# EAGLE board Testing suite 1 layout (EAGLE 9.2.2)
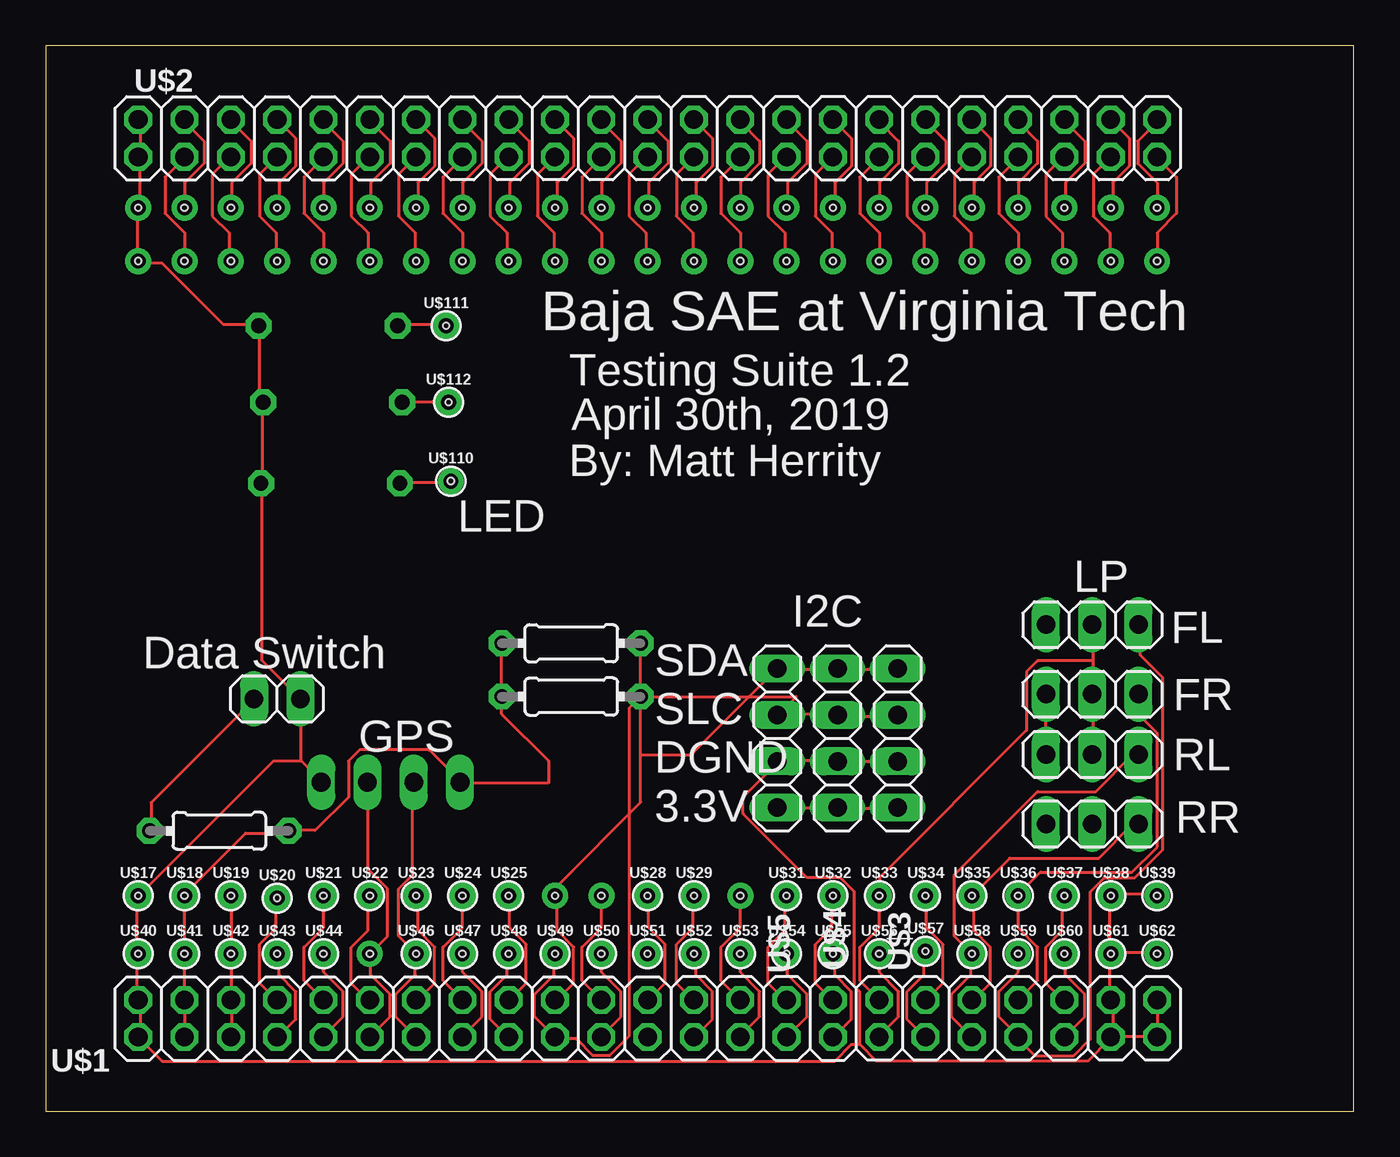
[diagram p0: board, top side]
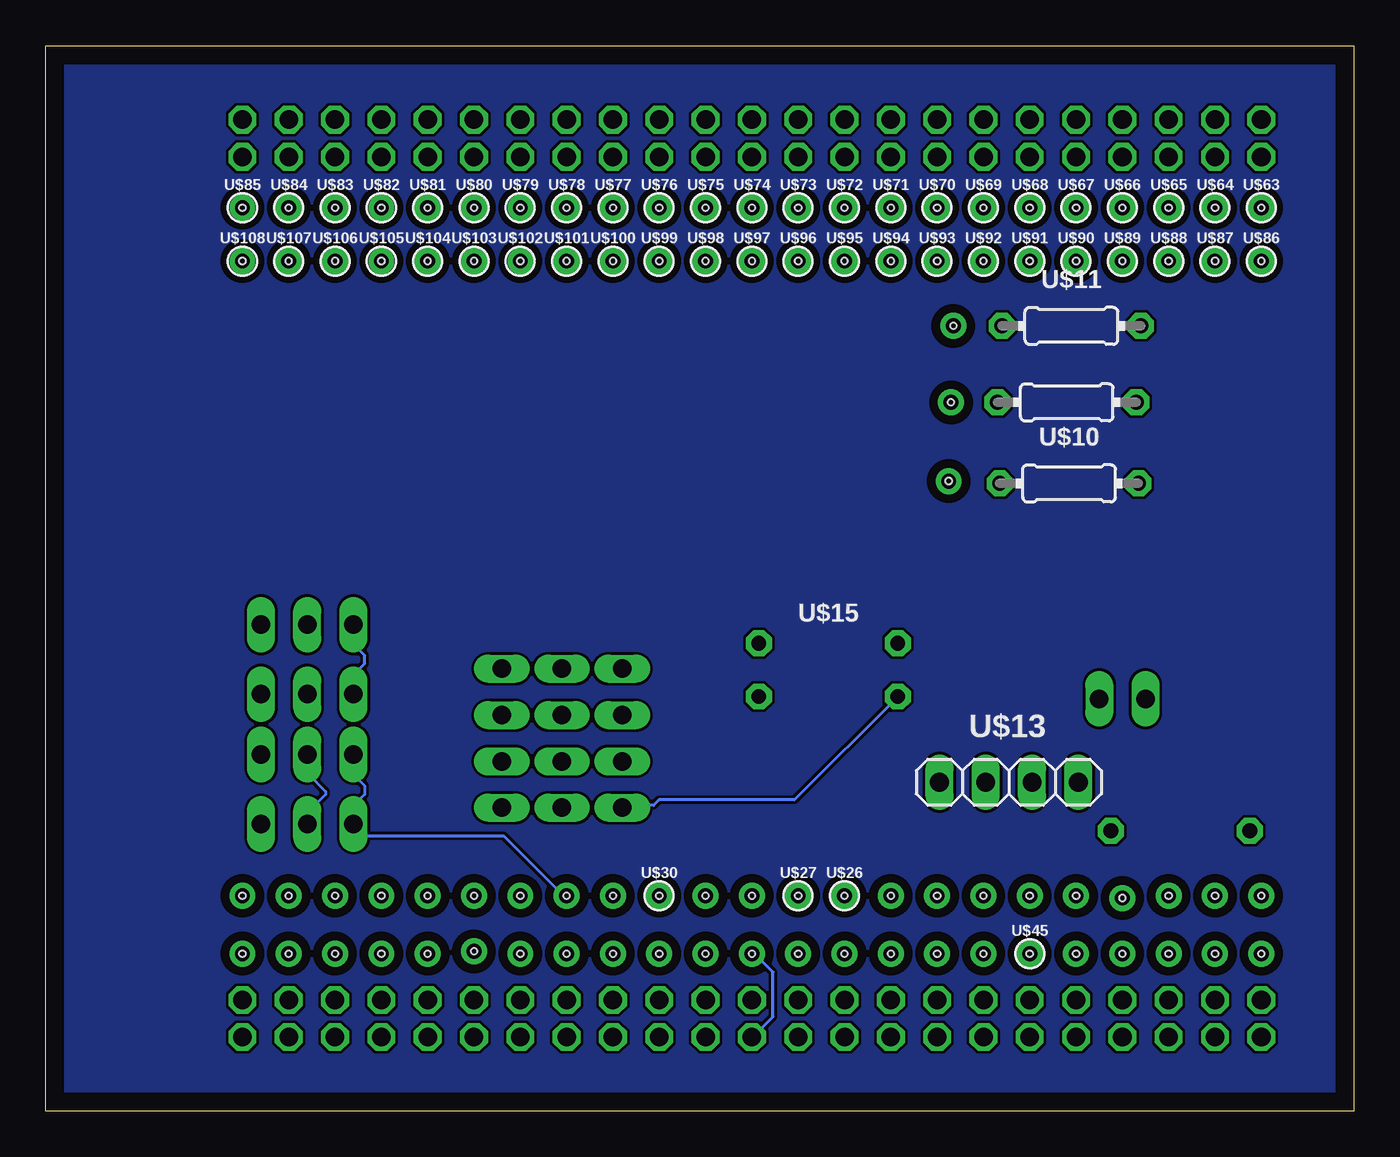
[diagram p1: board, bottom side, seen from below]

Size 71.75 x 58.42 mm. Coordinates in mm from the lower left corner, seen from the top.
Outline: 0,0 71.75,0 71.75,58.42 0,58.42 0,0
Copper layers (1*16): Top 0.035mm / dielectric 1.5mm / Bottom 0.035mm
Design rules "default": minimum track width 6mil, minimum drill 0.35mm, track to track 6mil, track to pad 6mil, pad to pad 6mil, via to via 6mil, smd to smd 6mil, copper to edge 40mil, drill to drill 6mil, minimum pad ring 10mil, minimum via ring 8mil, stop-mask expansion 4mil, vias tented up to drill 0mil, thermal gap 10mil

## Footprints (pad centres in the part's own frame; a part is rotated, then mirrored left to right if it is on the bottom)
2X23 = drill 1.016 octagon: 1 -27.94,-1.27; 2 -27.94,0.762; 3 -25.4,-1.27; 4 -25.4,0.762; 5 -22.86,-1.27; 6 -22.86,0.762; 7 -20.32,-1.27; 8 -20.32,0.762; 9 -17.78,-1.27; 10 -17.78,0.762; 11 -15.24,-1.27; 12 -15.24,0.762; 13 -12.7,-1.27; 14 -12.7,0.762; 15 -10.16,-1.27; 16 -10.16,0.762; 17 -7.62,-1.27; 18 -7.62,0.762; 19 -5.08,-1.27; 20 -5.08,0.762; 21 -2.54,-1.27; 22 -2.54,0.762; 23 0,-1.27; 24 0,0.762; 25 2.54,-1.27; 26 2.54,0.762; 27 5.08,-1.27; 28 5.08,0.762; 29 7.62,-1.27; 30 7.62,0.762; 31 10.16,-1.27; 32 10.16,0.762; 33 12.7,-1.27; 34 12.7,0.762; 35 15.24,-1.27; 36 15.24,0.762; 37 17.78,-1.27; 38 17.78,0.762; 39 20.32,-1.27; 40 20.32,0.762; 41 22.86,-1.27; 42 22.86,0.762; 43 25.4,-1.27; 44 25.4,0.762; 45 27.94,-1.27; 46 27.94,0.762
1X04 = drill 1.016 long: 1 -3.81,0; 2 -1.27,0; 3 1.27,0; 4 3.81,0
1X03 = drill 1.016 long: 1 -2.54,0; 2 0,0; 3 2.54,0
0204/7 = drill 0.813 pad 1.422 octagon: 1 -3.81,0; 2 3.81,0
PAD_OUT = drill 0.813 pad 1.422: 1 0,0 | hole 0.35: 0,0
1X02 = drill 1.016 long: 1 -1.27,0; 2 1.27,0

## Placement (x,y rotation side)
U$1  PIN-TOBEAGLEBONE  [2X23]  33.02,5.33 0 top
U$2  PIN-TOBEAGLEBONE  [2X23]  33.02,53.59 0 top
U$3  I2C-PINS  [1X04]  46.74,20.45 90 top
U$4  I2C-PINS  [1X04]  43.43,20.45 90 top
U$5  I2C-PINS  [1X04]  40.13,20.45 90 top
U$6  LP_PINS  [1X03]  57.4,26.67 0 top
U$7  LP_PINS  [1X03]  57.4,22.86 0 top
U$8  LP_PINS  [1X03]  57.4,19.56 0 top
U$9  LP_PINS  [1X03]  57.4,15.75 0 top
U$10  R-400MWRESISTOR  [0204/7]  15.62,34.42 0 bottom
U$11  R-400MWRESISTOR  [0204/7]  15.49,43.05 0 bottom
U$12  R-400MWRESISTOR  [0204/7]  15.75,38.86 0 bottom
U$13  GPS_PINS  [1X04]  18.92,18.03 0 bottom
U$14  R-400MWRESISTOR  [0204/7]  9.53,15.37 180 top
U$15  R-400MWRESISTOR  [0204/7]  28.83,25.65 0 top
U$16  R-400MWRESISTOR  [0204/7]  28.83,22.73 0 top
U$17  PAD_OUT  [PAD_OUT]  5.08,11.81 0 top
U$18  PAD_OUT  [PAD_OUT]  7.62,11.81 0 top
U$19  PAD_OUT  [PAD_OUT]  10.16,11.81 0 top
U$20  PAD_OUT  [PAD_OUT]  12.7,11.68 0 top
U$21  PAD_OUT  [PAD_OUT]  15.24,11.81 0 top
U$22  PAD_OUT  [PAD_OUT]  17.78,11.81 0 top
U$23  PAD_OUT  [PAD_OUT]  20.32,11.81 0 top
U$24  PAD_OUT  [PAD_OUT]  22.86,11.81 0 top
U$25  PAD_OUT  [PAD_OUT]  25.4,11.81 0 top
U$26  PAD_OUT  [PAD_OUT]  27.94,11.81 0 bottom
U$27  PAD_OUT  [PAD_OUT]  30.48,11.81 0 bottom
U$28  PAD_OUT  [PAD_OUT]  33.02,11.81 0 top
U$29  PAD_OUT  [PAD_OUT]  35.56,11.81 0 top
U$30  PAD_OUT  [PAD_OUT]  38.1,11.81 0 bottom
U$31  PAD_OUT  [PAD_OUT]  40.64,11.81 0 top
U$32  PAD_OUT  [PAD_OUT]  43.18,11.81 0 top
U$33  PAD_OUT  [PAD_OUT]  45.72,11.81 0 top
U$34  PAD_OUT  [PAD_OUT]  48.26,11.81 0 top
U$35  PAD_OUT  [PAD_OUT]  50.8,11.81 0 top
U$36  PAD_OUT  [PAD_OUT]  53.34,11.81 0 top
U$37  PAD_OUT  [PAD_OUT]  55.88,11.81 0 top
U$38  PAD_OUT  [PAD_OUT]  58.42,11.81 0 top
U$39  PAD_OUT  [PAD_OUT]  60.96,11.81 0 top
U$40  PAD_OUT  [PAD_OUT]  5.08,8.64 0 top
U$41  PAD_OUT  [PAD_OUT]  7.62,8.64 0 top
U$42  PAD_OUT  [PAD_OUT]  10.16,8.64 0 top
U$43  PAD_OUT  [PAD_OUT]  12.7,8.64 0 top
U$44  PAD_OUT  [PAD_OUT]  15.24,8.64 0 top
U$45  PAD_OUT  [PAD_OUT]  17.78,8.64 0 bottom
U$46  PAD_OUT  [PAD_OUT]  20.32,8.64 0 top
U$47  PAD_OUT  [PAD_OUT]  22.86,8.64 0 top
U$48  PAD_OUT  [PAD_OUT]  25.4,8.64 0 top
U$49  PAD_OUT  [PAD_OUT]  27.94,8.64 0 top
U$50  PAD_OUT  [PAD_OUT]  30.48,8.64 0 top
U$51  PAD_OUT  [PAD_OUT]  33.02,8.64 0 top
U$52  PAD_OUT  [PAD_OUT]  35.56,8.64 0 top
U$53  PAD_OUT  [PAD_OUT]  38.1,8.64 0 top
U$54  PAD_OUT  [PAD_OUT]  40.64,8.64 0 top
U$55  PAD_OUT  [PAD_OUT]  43.18,8.64 0 top
U$56  PAD_OUT  [PAD_OUT]  45.72,8.64 0 top
U$57  PAD_OUT  [PAD_OUT]  48.26,8.76 0 top
U$58  PAD_OUT  [PAD_OUT]  50.8,8.64 0 top
U$59  PAD_OUT  [PAD_OUT]  53.34,8.64 0 top
U$60  PAD_OUT  [PAD_OUT]  55.88,8.64 0 top
U$61  PAD_OUT  [PAD_OUT]  58.42,8.64 0 top
U$62  PAD_OUT  [PAD_OUT]  60.96,8.64 0 top
U$63  PAD_OUT  [PAD_OUT]  5.08,49.53 0 bottom
U$64  PAD_OUT  [PAD_OUT]  7.62,49.53 0 bottom
U$65  PAD_OUT  [PAD_OUT]  10.16,49.53 0 bottom
U$66  PAD_OUT  [PAD_OUT]  12.7,49.53 0 bottom
U$67  PAD_OUT  [PAD_OUT]  15.24,49.53 0 bottom
U$68  PAD_OUT  [PAD_OUT]  17.78,49.53 0 bottom
U$69  PAD_OUT  [PAD_OUT]  20.32,49.53 0 bottom
U$70  PAD_OUT  [PAD_OUT]  22.86,49.53 0 bottom
U$71  PAD_OUT  [PAD_OUT]  25.4,49.53 0 bottom
U$72  PAD_OUT  [PAD_OUT]  27.94,49.53 0 bottom
U$73  PAD_OUT  [PAD_OUT]  30.48,49.53 0 bottom
U$74  PAD_OUT  [PAD_OUT]  33.02,49.53 0 bottom
U$75  PAD_OUT  [PAD_OUT]  35.56,49.53 0 bottom
U$76  PAD_OUT  [PAD_OUT]  38.1,49.53 0 bottom
U$77  PAD_OUT  [PAD_OUT]  40.64,49.53 0 bottom
U$78  PAD_OUT  [PAD_OUT]  43.18,49.53 0 bottom
U$79  PAD_OUT  [PAD_OUT]  45.72,49.53 0 bottom
U$80  PAD_OUT  [PAD_OUT]  48.26,49.53 0 bottom
U$81  PAD_OUT  [PAD_OUT]  50.8,49.53 0 bottom
U$82  PAD_OUT  [PAD_OUT]  53.34,49.53 0 bottom
U$83  PAD_OUT  [PAD_OUT]  55.88,49.53 0 bottom
U$84  PAD_OUT  [PAD_OUT]  58.42,49.53 0 bottom
U$85  PAD_OUT  [PAD_OUT]  60.96,49.53 0 bottom
U$86  PAD_OUT  [PAD_OUT]  5.08,46.61 0 bottom
U$87  PAD_OUT  [PAD_OUT]  7.62,46.61 0 bottom
U$88  PAD_OUT  [PAD_OUT]  10.16,46.61 0 bottom
U$89  PAD_OUT  [PAD_OUT]  12.7,46.61 0 bottom
U$90  PAD_OUT  [PAD_OUT]  15.24,46.61 0 bottom
U$91  PAD_OUT  [PAD_OUT]  17.78,46.61 0 bottom
U$92  PAD_OUT  [PAD_OUT]  20.32,46.61 0 bottom
U$93  PAD_OUT  [PAD_OUT]  22.86,46.61 0 bottom
U$94  PAD_OUT  [PAD_OUT]  25.4,46.61 0 bottom
U$95  PAD_OUT  [PAD_OUT]  27.94,46.61 0 bottom
U$96  PAD_OUT  [PAD_OUT]  30.48,46.61 0 bottom
U$97  PAD_OUT  [PAD_OUT]  33.02,46.61 0 bottom
U$98  PAD_OUT  [PAD_OUT]  35.56,46.61 0 bottom
U$99  PAD_OUT  [PAD_OUT]  38.1,46.61 0 bottom
U$100  PAD_OUT  [PAD_OUT]  40.64,46.61 0 bottom
U$101  PAD_OUT  [PAD_OUT]  43.18,46.61 0 bottom
U$102  PAD_OUT  [PAD_OUT]  45.72,46.61 0 bottom
U$103  PAD_OUT  [PAD_OUT]  48.26,46.61 0 bottom
U$104  PAD_OUT  [PAD_OUT]  50.8,46.61 0 bottom
U$105  PAD_OUT  [PAD_OUT]  53.34,46.61 0 bottom
U$106  PAD_OUT  [PAD_OUT]  55.88,46.61 0 bottom
U$107  PAD_OUT  [PAD_OUT]  58.42,46.61 0 bottom
U$108  PAD_OUT  [PAD_OUT]  60.96,46.61 0 bottom
U$109  SWITCH_OUT  [1X02]  12.7,22.61 180 top
U$110  PAD_OUT  [PAD_OUT]  22.23,34.54 0 top
U$111  PAD_OUT  [PAD_OUT]  21.97,43.05 0 top
U$112  PAD_OUT  [PAD_OUT]  22.1,38.86 0 top

## Library data of the parts
U$1-U$112 = TestingCape

## Nets
N$1: U$1.39 U$6.3 U$59.1
N$2: U$1.40 U$7.3 U$36.1
N$3: U$1.5 U$1.6 U$19.1 U$42.1
N$4: U$14.2 U$109.2
N$5: U$1.37 U$8.3 U$58.1
N$6: U$1.19 U$3.3 U$4.3 U$5.3 U$16.2 U$49.1
N$7: U$1.20 U$3.4 U$4.4 U$5.4 U$15.2 U$26.1
N$8: U$1.32 U$6.1 U$7.1 U$8.1 U$9.1 U$32.1
N$9: U$1.34 U$6.2 U$7.2 U$8.2 U$9.2 U$33.1
N$10: U$1.38 U$9.3 U$35.1
N$11: U$1.1 U$1.2 U$1.43 U$1.44 U$1.45 U$1.46 U$2.1 U$2.2 U$3.2 U$4.2 U$5.2 U$10.2 U$11.2 U$12.2 U$13.4 U$17.1 U$38.1 U$39.1 U$40.1 U$61.1 U$62.1 U$63.1 U$86.1 U$109.1
N$12: U$1.11 U$13.3 U$45.1
N$13: U$1.13 U$13.2 U$46.1
N$14: U$1.41 U$60.1
N$15: U$1.35 U$57.1
N$16: U$1.33 U$56.1
N$17: U$1.31 U$55.1
N$18: U$1.29 U$54.1
N$19: U$1.27 U$53.1
N$20: U$1.25 U$52.1
N$21: U$1.23 U$51.1
N$22: U$1.21 U$50.1
N$23: U$1.17 U$48.1
N$24: U$1.15 U$47.1
N$25: U$1.9 U$44.1
N$26: U$1.7 U$43.1
N$27: U$1.42 U$37.1
N$28: U$1.36 U$34.1
N$29: U$1.30 U$31.1
N$30: U$1.28 U$30.1
N$31: U$1.8 U$20.1
N$32: U$1.10 U$21.1
N$33: U$1.12 U$22.1
N$34: U$1.14 U$23.1
N$35: U$1.16 U$24.1
N$36: U$1.18 U$25.1
N$37: U$1.22 U$27.1
N$38: U$1.24 U$28.1
N$39: U$1.26 U$29.1
N$40: U$2.3 U$87.1
N$41: U$2.5 U$88.1
N$42: U$2.7 U$89.1
N$43: U$2.9 U$90.1
N$44: U$2.11 U$91.1
N$45: U$2.13 U$92.1
N$46: U$2.15 U$93.1
N$47: U$2.17 U$94.1
N$48: U$2.19 U$95.1
N$49: U$2.21 U$96.1
N$50: U$2.23 U$97.1
N$51: U$2.25 U$98.1
N$52: U$2.27 U$99.1
N$53: U$2.28 U$76.1
N$54: U$2.26 U$75.1
N$55: U$2.24 U$74.1
N$56: U$2.22 U$73.1
N$57: U$2.20 U$72.1
N$58: U$2.18 U$71.1
N$59: U$2.16 U$70.1
N$60: U$2.4 U$64.1
N$61: U$2.6 U$65.1
N$62: U$2.8 U$66.1
N$63: U$2.10 U$67.1
N$64: U$2.12 U$68.1
N$65: U$2.14 U$69.1
N$66: U$2.29 U$100.1
N$67: U$2.30 U$77.1
N$68: U$2.32 U$78.1
N$69: U$2.31 U$101.1
N$70: U$2.33 U$102.1
N$71: U$2.34 U$79.1
N$72: U$2.36 U$80.1
N$73: U$2.35 U$103.1
N$74: U$2.37 U$104.1
N$75: U$2.39 U$105.1
N$76: U$2.41 U$106.1
N$77: U$2.43 U$107.1
N$78: U$2.45 U$108.1
N$79: U$2.46 U$85.1
N$80: U$2.44 U$84.1
N$81: U$2.42 U$83.1
N$82: U$2.40 U$82.1
N$83: U$2.38 U$81.1
N$85: U$1.3 U$1.4 U$3.1 U$4.1 U$5.1 U$13.1 U$14.1 U$15.1 U$16.1 U$18.1 U$41.1
N$86: U$10.1 U$110.1
N$87: U$11.1 U$111.1
N$88: U$12.1 U$112.1

## Tracks (layer width: path | path; a pad name or v marks a point on that pad's centre or on a via)
GND
  pour Bottom: 0,0 71.75,0 71.75,58.42 0,58.42
N$1
  Top 0.152: U$59.1 53.34,7.62 52.27,6.55 52.27,5.18 53.34,4.12 U$1.39 53.34,3.96 54.25,3.05 56.39,3.05 57.3,3.96 57.3,12.04 58.06,12.8 59.74,12.8 61.27,14.33 61.27,23.77 60.05,24.99 60.05,26.67 U$6.3
N$2
  Top 0.152: U$1.40 54.41,7.16 54.41,8.99 53.34,10.06 U$36.1 53.34,11.89 54.56,13.11 59.59,13.11 60.96,14.48 60.96,20.73 60.05,21.64 60.05,22.86 U$7.3
N$3
  Top 0.152: 10.21,6.1 10.21,8.53 U$42.1 10.21,8.69 10.21,11.73 U$19.1 | 10.21,6.1 10.21,4.12 U$1.5 | 10.21,6.1 U$1.6
N$4
  Top 0.152: U$14.2 5.79,15.39 5.79,16.92 11.43,22.55 U$109.2
N$5
  Top 0.152: U$1.37 49.68,5.18 49.68,6.4 50.75,7.47 50.75,8.53 U$58.1 49.84,9.6 49.84,12.95 54.41,17.53 57.61,17.53 59.59,19.51 59.89,19.51 U$8.3
N$6
  Top 0.152: U$49.1 27.89,8.53 27.89,7.47 26.82,6.4 26.82,5.18 U$1.19 28.04,3.96 29.11,3.96 30.02,3.05 30.94,3.05 32,4.12 32,22.1 U$16.2 41.17,22.73 40.08,21.64 U$5.3 40.23,21.79 43.33,21.79 U$4.3 43.48,21.64 46.74,21.64 U$3.3
N$7
  Top 0.152: U$1.20 28.04,6.1 28.96,7.01 28.96,8.99 28.04,9.91 28.04,11.73 U$26.1 28.04,11.89 28.04,12.34 32.64,16.94 U$15.2 32.64,19.51 35.36,19.51 40.08,24.23 U$5.4 40.23,24.23 43.33,24.23 U$4.4 43.48,24.23 46.74,24.23 U$3.4
N$8
  Top 0.152: U$32.1 43.13,11.73 43.13,10.06 42.22,9.14 42.22,7.01 43.13,6.1 U$1.32 | U$8.1 U$7.1
  Bottom 0.152: U$8.1 54.86,18.44 54.25,17.83 54.25,17.37 54.86,16.76 U$9.1 54.86,15.7 54.25,15.09 46.63,15.09 43.74,12.19 43.59,12.19 43.28,11.89 U$32.1 | U$6.1 54.86,25.6 54.25,24.99 54.25,24.54 54.86,23.93 U$7.1
N$9
  Top 0.152: U$1.34 44.65,7.16 44.65,8.99 45.72,10.06 U$33.1 45.72,12.8 53.8,20.88 53.8,24.08 54.41,24.69 57.45,24.69 | 57.45,22.86 57.45,19.66 U$8.2 | 57.45,22.86 57.45,24.69 | 57.45,24.69 57.45,26.67 U$6.2 | 57.45,22.86 U$7.2
  Bottom 0.152: U$9.2 57.3,15.85 57.3,16.46 56.39,17.37 56.39,17.53 57.3,18.44 57.3,19.51 U$8.2
N$10
  Top 0.152: U$1.38 50.9,6.1 51.82,7.01 51.82,8.99 50.9,9.91 50.9,11.73 U$35.1 50.9,11.89 52.88,13.87 57.76,13.87 59.59,15.7 59.89,15.7 U$9.3
N$11
  Top 0.152: U$3.2 U$4.2 43.33,19.2 40.23,19.2 U$5.2 40.08,19.05 38.25,17.22 38.25,16.31 41.76,12.8 43.59,12.8 44.35,12.04 44.35,6.86 44.65,6.55 44.65,3.66 | U$1.46 60.96,4.12 | U$39.1 60.96,11.89 58.52,11.89 U$38.1 58.37,11.73 58.37,8.69 U$61.1 | U$61.1 58.52,8.69 60.96,8.69 U$62.1 | 58.52,4.12 58.52,6.1 U$1.44 58.37,6.1 58.37,8.53 U$61.1 | 58.52,4.12 60.96,4.12 | 60.96,4.12 U$1.45 | 58.52,4.12 U$1.43 58.37,3.96 57.15,2.74 45.57,2.74 44.65,3.66 | U$2.2 5.18,54.25 5.18,52.43 U$2.1 5.18,52.27 5.18,49.53 U$63.1 5.03,49.53 5.03,46.63 U$86.1 5.18,46.48 6.4,46.48 9.75,43.13 11.58,43.13 U$11.2 11.73,42.98 11.73,39.01 11.89,38.86 | 11.89,38.86 11.89,34.44 U$10.2 11.89,34.29 11.89,24.69 U$109.1 14.02,22.55 14.02,19.2 | 11.89,38.86 U$12.2 | 14.02,19.2 15.09,18.14 U$13.4 | 14.02,19.2 12.5,19.2 5.18,11.89 U$17.1 5.03,11.73 5.03,8.69 U$40.1 5.03,8.53 5.03,6.1 U$1.2 5.18,6.1 5.18,4.12 U$1.1 6.4,2.74 43.28,2.74 44.2,3.66 44.65,3.66
N$12
  Top 0.152: U$1.11 18.9,5.18 18.9,6.4 17.83,7.47 17.83,8.53 U$45.1 18.75,9.6 18.75,12.19 17.68,13.26 17.68,17.98 U$13.3
N$13
  Top 0.152: U$1.13 19.2,5.18 19.2,6.4 20.27,7.47 20.27,8.53 U$46.1 19.36,9.6 19.36,12.19 20.12,12.95 20.12,17.98 U$13.2
N$14
  Top 0.152: U$1.41 57,5.18 57,6.4 55.93,7.47 55.93,8.53 U$60.1
N$15
  Top 0.152: U$57.1 48.16,8.69 48.16,7.47 47.24,6.55 47.24,5.03 48.16,4.12 U$1.35
N$16
  Top 0.152: U$56.1 45.72,7.62 46.79,6.55 46.79,5.18 45.72,4.12 U$1.33
N$17
  Top 0.152: U$55.1 43.28,8.53 43.28,7.47 44.2,6.55 44.2,5.03 43.28,4.12 U$1.31
N$18
  Top 0.152: U$1.29 41.76,5.18 41.76,6.4 40.69,7.47 40.69,8.53 U$54.1
N$19
  Top 0.152: U$53.1 38.1,7.62 39.17,6.55 39.17,5.18 38.1,4.12 U$1.27
N$20
  Top 0.152: U$52.1 35.66,8.53 35.66,7.47 36.58,6.55 36.58,5.03 35.66,4.12 U$1.25
N$21
  Bottom 0.152: U$51.1 32.61,8.23 32.46,8.23 31.85,7.62 31.85,5.18 32.92,4.12 U$1.23
N$22
  Top 0.152: U$50.1 30.48,7.62 31.55,6.55 31.55,5.18 30.48,4.12 U$1.21
N$23
  Top 0.152: U$48.1 25.3,8.53 25.3,7.47 24.38,6.55 24.38,5.03 25.3,4.12 U$1.17
N$24
  Top 0.152: U$47.1 22.86,7.62 23.93,6.55 23.93,5.18 22.86,4.12 U$1.15
N$25
  Top 0.152: U$44.1 15.24,7.62 16.31,6.55 16.31,5.18 15.24,4.12 U$1.9
N$26
  Top 0.152: U$43.1 12.8,8.53 12.8,7.47 13.72,6.55 13.72,5.03 12.8,4.12 U$1.7
N$27
  Top 0.152: U$37.1 55.78,11.73 55.78,9.91 54.86,8.99 54.86,7.01 55.78,6.1 U$1.42
N$28
  Top 0.152: U$34.1 48.31,11.73 48.31,10.06 49.23,9.14 49.23,7.01 48.31,6.1 U$1.36
N$29
  Top 0.152: U$31.1 40.54,11.73 40.54,9.91 39.62,8.99 39.62,7.01 40.54,6.1 U$1.30
N$30
  Top 0.152: U$30.1 38.1,10.06 37.03,8.99 37.03,7.16 U$1.28
N$31
  Top 0.152: U$20.1 12.65,11.58 12.65,10.06 11.73,9.14 11.73,7.01 12.65,6.1 U$1.8
N$32
  Top 0.152: U$21.1 15.24,10.06 14.17,8.99 14.17,7.16 U$1.10
N$33
  Top 0.152: U$22.1 17.68,11.73 17.68,9.91 16.76,8.99 16.76,7.01 17.68,6.1 U$1.12
N$34
  Top 0.152: U$23.1 20.42,11.73 20.42,9.91 21.34,8.99 21.34,7.01 20.42,6.1 U$1.14
N$35
  Top 0.152: U$24.1 22.86,10.06 21.79,8.99 21.79,7.16 U$1.16
N$36
  Top 0.152: U$25.1 25.45,11.73 25.45,10.06 26.36,9.14 26.36,7.01 25.45,6.1 U$1.18
N$37
  Top 0.152: U$27.1 30.48,10.06 29.41,8.99 29.41,7.16 U$1.22
N$38
  Top 0.152: U$28.1 33.07,11.73 33.07,10.06 33.98,9.14 33.98,7.01 33.07,6.1 U$1.24
N$39
  Top 0.152: U$29.1 35.51,11.73 35.51,10.06 34.59,9.14 34.59,7.01 35.51,6.1 U$1.26
N$40
  Top 0.152: U$87.1 7.62,48.16 6.55,49.23 6.55,51.21 7.62,52.27 U$2.3
N$41
  Top 0.152: U$88.1 10.06,46.63 10.06,48.16 9.14,49.07 9.14,51.36 10.06,52.27 U$2.5
N$42
  Top 0.152: U$2.7 11.73,51.36 11.73,49.07 12.65,48.16 12.65,46.63 U$89.1
N$43
  Top 0.152: U$90.1 15.24,48.16 14.17,49.23 14.17,51.21 15.24,52.27 U$2.9
N$44
  Top 0.152: U$91.1 17.68,46.63 17.68,48.16 16.76,49.07 16.76,51.36 17.68,52.27 U$2.11
N$45
  Top 0.152: U$2.13 19.36,51.36 19.36,49.07 20.27,48.16 20.27,46.63 U$92.1
N$46
  Top 0.152: U$93.1 22.86,48.16 21.79,49.23 21.79,51.21 22.86,52.27 U$2.15
N$47
  Top 0.152: U$94.1 25.3,46.63 25.3,48.16 24.38,49.07 24.38,51.36 25.3,52.27 U$2.17
N$48
  Top 0.152: U$2.19 26.98,51.36 26.98,49.07 27.89,48.16 27.89,46.63 U$95.1
N$49
  Top 0.152: U$96.1 30.48,48.16 29.41,49.23 29.41,51.21 30.48,52.27 U$2.21
N$50
  Top 0.152: U$97.1 32.92,46.63 32.92,48.16 32,49.07 32,51.36 32.92,52.27 U$2.23
N$51
  Top 0.152: U$2.25 34.59,51.36 34.59,49.07 35.51,48.16 35.51,46.63 U$98.1
N$52
  Top 0.152: U$99.1 38.1,48.16 37.03,49.23 37.03,51.21 38.1,52.27 U$2.27
N$53
  Top 0.152: U$76.1 38.1,50.9 39.17,51.97 39.17,53.19 38.1,54.25 U$2.28
N$54
  Top 0.152: U$2.26 36.58,53.34 36.58,51.82 35.66,50.9 35.66,49.53 U$75.1
N$55
  Top 0.152: U$74.1 33.07,49.53 33.07,50.9 34.14,51.97 34.14,53.19 33.07,54.25 U$2.24
N$56
  Top 0.152: U$73.1 30.48,50.9 31.55,51.97 31.55,53.19 30.48,54.25 U$2.22
N$57
  Top 0.152: U$2.20 28.96,53.34 28.96,51.82 28.04,50.9 28.04,49.53 U$72.1
N$58
  Top 0.152: U$71.1 25.45,49.53 25.45,50.9 26.52,51.97 26.52,53.19 25.45,54.25 U$2.18
N$59
  Top 0.152: U$70.1 22.86,50.9 23.93,51.97 23.93,53.19 22.86,54.25 U$2.16
N$60
  Top 0.152: U$64.1 7.62,50.9 8.69,51.97 8.69,53.19 7.62,54.25 U$2.4
N$61
  Top 0.152: U$65.1 10.21,49.53 10.21,50.9 11.28,51.97 11.28,53.19 10.21,54.25 U$2.6
N$62
  Top 0.152: U$2.8 13.72,53.34 13.72,51.82 12.8,50.9 12.8,49.53 U$66.1
N$63
  Top 0.152: U$67.1 15.24,50.9 16.31,51.97 16.31,53.19 15.24,54.25 U$2.10
N$64
  Top 0.152: U$68.1 17.83,49.53 17.83,50.9 18.9,51.97 18.9,53.19 17.83,54.25 U$2.12
N$65
  Top 0.152: U$2.14 21.34,53.34 21.34,51.82 20.42,50.9 20.42,49.53 U$69.1
N$66
  Top 0.152: U$100.1 40.54,46.63 40.54,48.16 39.62,49.07 39.62,51.36 40.54,52.27 U$2.29
N$67
  Top 0.152: U$77.1 40.69,49.53 40.69,50.9 41.76,51.97 41.76,53.19 40.69,54.25 U$2.30
N$68
  Top 0.152: U$2.32 44.2,53.34 44.2,51.82 43.28,50.9 43.28,49.53 U$78.1
N$69
  Top 0.152: U$2.31 42.22,51.36 42.22,49.07 43.13,48.16 43.13,46.63 U$101.1
N$70
  Top 0.152: U$102.1 45.72,48.16 44.65,49.23 44.65,51.21 45.72,52.27 U$2.33
N$71
  Top 0.152: U$79.1 45.72,50.9 46.79,51.97 46.79,53.19 45.72,54.25 U$2.34
N$72
  Top 0.152: U$80.1 48.31,49.53 48.31,50.9 49.38,51.97 49.38,53.19 48.31,54.25 U$2.36
N$73
  Top 0.152: U$103.1 48.16,46.63 48.16,48.16 47.24,49.07 47.24,51.36 48.16,52.27 U$2.35
N$74
  Top 0.152: U$2.37 49.84,51.36 49.84,49.07 50.75,48.16 50.75,46.63 U$104.1
N$75
  Top 0.152: U$105.1 53.34,48.16 52.27,49.23 52.27,51.21 53.34,52.27 U$2.39
N$76
  Top 0.152: U$106.1 55.78,46.63 55.78,48.16 54.86,49.07 54.86,51.36 55.78,52.27 U$2.41
N$77
  Top 0.152: U$2.43 57.45,51.36 57.45,49.07 58.37,48.16 58.37,46.63 U$107.1
N$78
  Top 0.152: U$108.1 60.96,48.16 62.03,49.23 62.03,51.21 60.96,52.27 U$2.45
N$79
  Top 0.152: U$85.1 60.96,50.9 59.89,51.97 59.89,53.19 60.96,54.25 U$2.46
N$80
  Top 0.152: U$2.44 59.44,53.34 59.44,51.82 58.52,50.9 58.52,49.53 U$84.1
N$81
  Top 0.152: U$83.1 55.93,49.53 55.93,50.9 57,51.97 57,53.19 55.93,54.25 U$2.42
N$82
  Top 0.152: U$82.1 53.34,50.9 54.41,51.97 54.41,53.19 53.34,54.25 U$2.40
N$83
  Top 0.152: U$2.38 51.82,53.34 51.82,51.82 50.9,50.9 50.9,49.53 U$81.1
N$85
  Top 0.152: U$1.3 U$1.4 U$41.1 U$18.1 7.62,11.89 10.97,15.24 13.26,15.24 U$14.1 13.41,15.39 14.78,15.39 16.61,17.22 16.61,19.2 17.22,19.81 21.03,19.81 22.71,18.14 U$13.1 22.86,17.98 27.58,17.98 27.58,19.2 25.02,21.77 U$16.1 U$15.1 | U$5.1 40.23,16.61 43.33,16.61 U$4.1 43.48,16.61 46.74,16.61 U$3.1
  Bottom 0.152: U$16.1 30.68,17.07 38.1,17.07 38.41,16.76 40.08,16.76 U$5.1
N$86
  Top 0.152: U$10.1 19.51,34.44 22.1,34.44 U$110.1
N$87
  Top 0.152: U$11.1 19.36,43.13 21.95,43.13 U$111.1
N$88
  Top 0.152: U$112.1 U$12.1

## Text on the board
tPlace: Baja SAE at Virginia Tech | Testing Suite 1.2 | April 30th, 2019 | By: Matt Herrity | LED | LP | FL | Data Switch | FR | GPS | RL | I2C / SDA / SLC / DGND / 3.3V | RR